# Altium PCB Blue Pill Pinout.PcbDoc
Units mil, origin at the board's own origin, x right, y up, seen from the top; angles counter-clockwise.
Board outline 1210 x 3755 mil, 2 copper layers (Top Layer, Bottom Layer); 25 components, 0 nets, 206 pads, 0 vias.
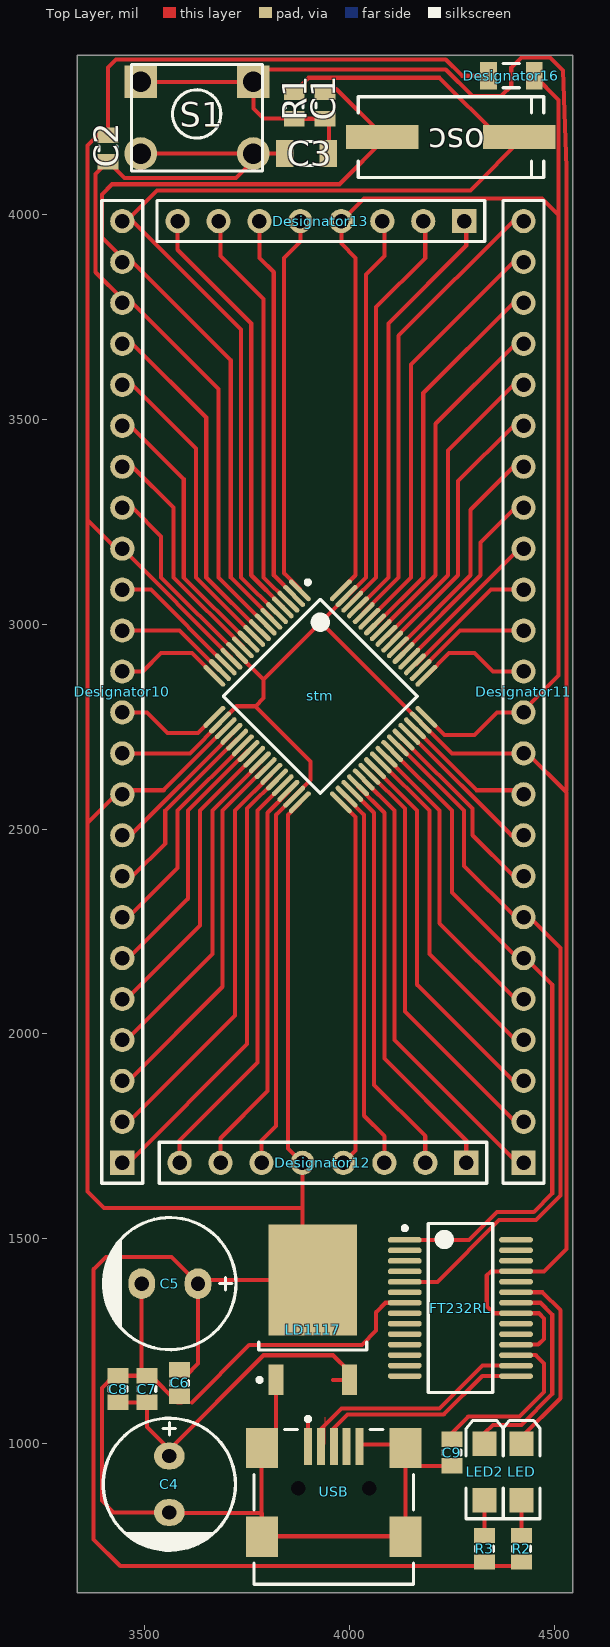
[diagram p0: Top Layer view]
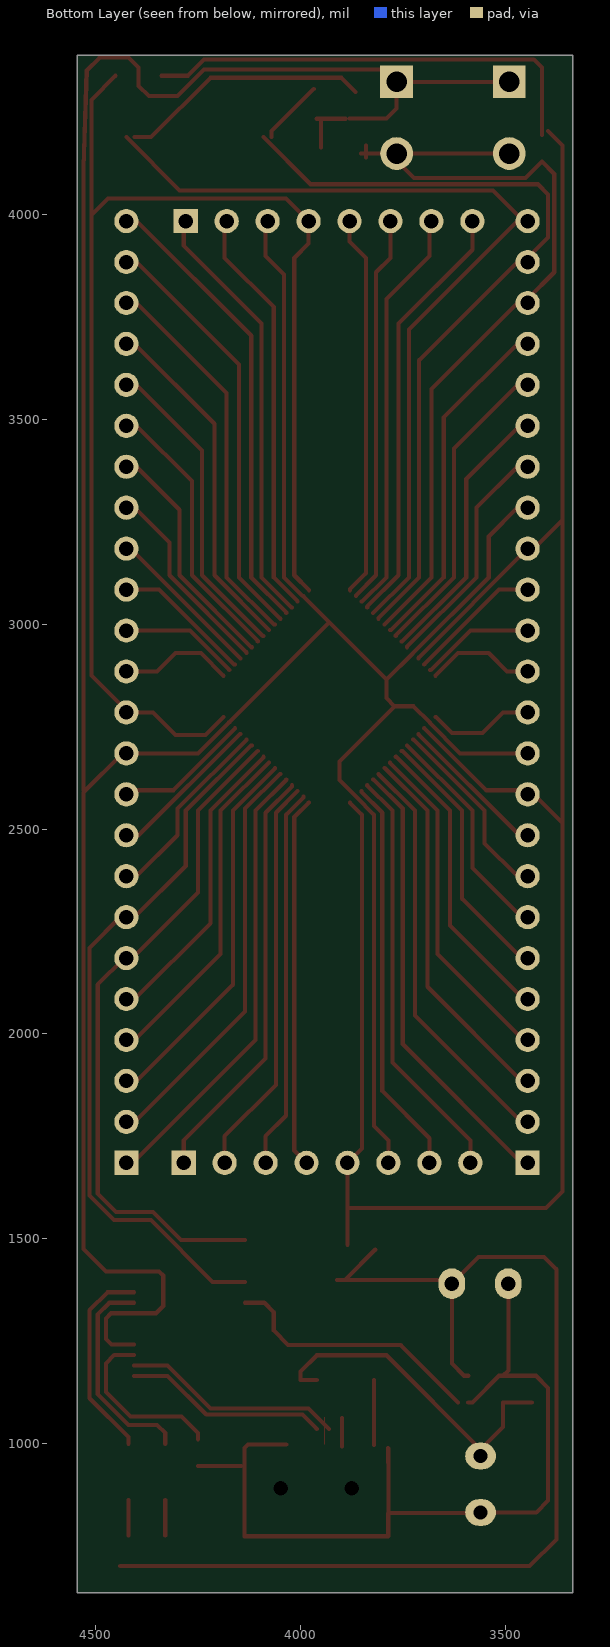
[diagram p1: Bottom Layer view, seen from below]

## Layer stack, top to bottom
Top Solder: solder mask 0.4, Solder Resist, Dk 3.5
Top Layer: signal copper 1.4
Dielectric 1: dielectric 12.6, FR-4, Dk 4.8
Bottom Layer: signal copper 1.4
Bottom Solder: solder mask 0.4, Solder Resist, Dk 3.5

## Board outline
3335,635 4545,635 4545,4390 3335,4390

## Design rules (kind name [scope] priority, off if disabled: settings)
Clearance [All] p1: gap=10 ignorepadtopadclearanceinfootprint=FALSE except(0: Arc-Hole Track-Hole SMDPad-Hole THPad-Hole Via-Hole Fill-Hole Poly-Hole Region-Hole Text-Hole)
PolygonConnect [All] p1: connectstyle=Relief reliefconductorwidth=10 reliefentries=4 polygonreliefangle="90 Angle" airgapwidth=10
RoutingVias [All] p1: holewidth=28 width=50 viastyle="Through Hole" minholewidth=28 minwidth=50 maxholewidth=28 maxwidth=50
SolderMaskExpansion [All] p1: expansion=4 istentingtop=FALSE
Width [All] p1: maxlimit=10 minlimit=10 preferedwidth=10
30 further rules are at their usual default settings.

## Classes and differential pairs
component class Sheet1: C1 C2 C3 osc R1 S1 stm

## Components (designator, comment, footprint, x,y, rotation, side; value= is the part's Value field where it differs from the comment)
C1 "22pF" SMD_CAP_0805 3940,4235.04 r90 top
C2 "22pF" SMD_CAP_0805 3410,4130 r90 top
C3 "Cap Semi" C1206 3895,4150 r0 top value=100nF
C4 "100uF" "cap 03" 3560,900 r90 top
C5 "100uF" "cap 03" 3561.1,1390 r0 top
C6 "100nF" SMD_CAP_0805 3585,1180 r270 top
C7 "100nF" SMD_CAP_0805 3505,1100 r90 top
C8 "100nF" SMD_CAP_0805 3435,1100.04 r90 top
C9 "100nF" SMD_CAP_0805 4250,1009.96 r270 top
Designator10 "Comment" HDR1X24 3445,1685 r90 top
Designator11 "Comment" HDR1X24 4425,1685 r90 top
Designator12 "Comment" HDR1X8 4285,1685 r180 top
Designator13 "Comment" HDR1X8 4280,3985 r180 top
Designator16 "Comment" "Jumper SMD" 4395,4340 r180 top
FT232RL "FT232RL" SSOP-28_N 4270.83,1330.43 r0 top
LD1117 "LM1117DT-x.x" TD03B_N 3910.24,1326.26 r90 top
LED "Red" "LED SMD 1206" 4420,930 r90 top (schematic designator LED1)
LED2 "Red" "LED SMD 1206" 4330,930 r90 top
osc "11.0592 MHz" "Crystal SMD" 4270,4190 r180 top
R1 "10K" "RES 0805 (2012X06L)" 3865,4300 r270 top
R2 "10K" "RES 0805 (2012X06L)" 4420,710.04 r90 top
R3 "10K" "RES 0805 (2012X06L)" 4330,710.04 r90 top
S1 "Switch PB" "Switch - Push to On" 3627.5,4237.5 r0 top
stm "STM32F103R8T6" LQFP64_N 3928.68,2824.39 r315 top
USB "USB mini" USB/SM0.8-6H5 3961.61,683.31 r270 top

## Footprints (in the part's own frame and the unit in brackets; to place one, negate y for a bottom-side part, rotate by r counter-clockwise, add the part's x,y. Pads: shape width x height; smd on the part's side, far side on the other; paste and mask are expansions set on the pad)
C1206 [mm] "Chip Capacitor, Body 3.2x1.6mm, IPC High Density"
  rect 1.1x1.7 smd: 1(-1.35,0) 2(1.35,0)
  silkscreen extent -0.4,-0.75 0.4,0.75, body extent -1.7,-0.9 1.7,0.9, height 1.3
"cap 03" [mil]
  oval 65x75 hole 35: 1(68.9,0) 2(-68.9,0)
  silkscreen extent -161,-161 161,161, body extent -159,-159 157,158, height 473
"Crystal SMD" [mm]
  rect 4.5x1.5 smd: 1(-3.683,0) 2(4.817,0)
  silkscreen extent -5.18,-2.5 6.32,2.5, body extent -5.64,-2.25 6.66,2.25, height 5.18
HDR1X8 [mm] "Connector; Header; 8 Position"
  rect 1.5x1.5 hole 0.9: 1(0,0)
  round 1.5 hole 0.9: 2(2.54,0) 3(5.08,0) 4(7.62,0) 5(10.16,0) 6(12.7,0) 7(15.24,0) 8(17.78,0)
  silkscreen extent -1.27,-1.27 19.05,1.27
HDR1X24 [mm] "Connector; Header; 24 Position"
  rect 1.5x1.5 hole 0.9: 1(0,0)
  round 1.5 hole 0.9: 2(2.54,0) 3(5.08,0) 4(7.62,0) 5(10.16,0) 6(12.7,0) 7(15.24,0) 8(17.78,0) 9(20.32,0) 10(22.86,0) 11(25.4,0) 12(27.94,0) 13(30.48,0) 14(33.02,0) 15(35.56,0) 16(38.1,0) 17(40.64,0) 18(43.18,0) 19(45.72,0) 20(48.26,0) 21(50.8,0) 22(53.34,0) 23(55.88,0) 24(58.42,0)
  silkscreen extent -1.27,-1.27 59.69,1.27
"Jumper SMD" [mm]
  rect 1.05x1.7 smd: 1(-1.425,0) 2(1.425,0)
  silkscreen extent -0.5,-0.75 0.5,0.75, body extent -1.52,-0.76 1.52,0.76, height 0.6
"LED SMD 1206" [mm]
  rect 1.5x1.5 smd: 1(-1.75,0) 2(1.75,0)
  silkscreen extent -2.9,-1.15 3.2,1.15, body extent -1.65,-0.76 1.65,0.69, height 1.36
LQFP64_N [mm] "Thin QFP, 64-Leads, Body 10x10mm, Pitch 0.5mm, IPC Medium Density"
  oval 1.8x0.3 smd: 1(-5.55,3.75) 2(-5.55,3.25) 3(-5.55,2.75) 4(-5.55,2.25) 5(-5.55,1.75) 6(-5.55,1.25) 7(-5.55,0.75) 8(-5.55,0.25) 9(-5.55,-0.25) 10(-5.55,-0.75) 11(-5.55,-1.25) 12(-5.55,-1.75) 13(-5.55,-2.25) 14(-5.55,-2.75) 15(-5.55,-3.25) 16(-5.55,-3.75) 33(5.55,-3.75) 34(5.55,-3.25) 35(5.55,-2.75) 36(5.55,-2.25) 37(5.55,-1.75) 38(5.55,-1.25) 39(5.55,-0.75) 40(5.55,-0.25) 41(5.55,0.25) 42(5.55,0.75) 43(5.55,1.25) 44(5.55,1.75) 45(5.55,2.25) 46(5.55,2.75) 47(5.55,3.25) 48(5.55,3.75)
  oval 0.3x1.8 smd: 17(-3.75,-5.55) 18(-3.25,-5.55) 19(-2.75,-5.55) 20(-2.25,-5.55) 21(-1.75,-5.55) 22(-1.25,-5.55) 23(-0.75,-5.55) 24(-0.25,-5.55) 25(0.25,-5.55) 26(0.75,-5.55) 27(1.25,-5.55) 28(1.75,-5.55) 29(2.25,-5.55) 30(2.75,-5.55) 31(3.25,-5.55) 32(3.75,-5.55) 49(3.75,5.55) 50(3.25,5.55) 51(2.75,5.55) 52(2.25,5.55) 53(1.75,5.55) 54(1.25,5.55) 55(0.75,5.55) 56(0.25,5.55) 57(-0.25,5.55) 58(-0.75,5.55) 59(-1.25,5.55) 60(-1.75,5.55) 61(-2.25,5.55) 62(-2.75,5.55) 63(-3.25,5.55) 64(-3.75,5.55)
  silkscreen extent -5.67,-4.25 4.25,4.57, body extent -5,-5 5,5, height 1.6
"RES 0805 (2012X06L)" [mm] "Chip Resistor, 2-Leads, Body 2.0x1.3mm, IPC High Density _ (0.100 W)"
  rect 0.95x1.3 smd: 1(0,0) 2(1.65,0)
  silkscreen extent 0.67,-0.55 0.98,0.55, body extent -0.19,-0.63 1.84,0.64, height 0.6
SMD_CAP_0805 [mm]
  rect 0.95x1.3 smd: 1(0,0) 2(1.65,0)
  silkscreen extent 0.67,-0.55 0.98,0.55, body extent -0.19,-0.63 1.84,0.63, height 0.65
SSOP-28_N [mm] "SOP, 28-Leads, Body 10.2x5.3mm, Pitch 0.65mm, IPC Medium Density"
  oval 2.1x0.35 smd: 1(-3.45,4.225) 2(-3.45,3.575) 3(-3.45,2.925) 4(-3.45,2.275) 5(-3.45,1.625) 6(-3.45,0.975) 7(-3.45,0.325) 8(-3.45,-0.325) 9(-3.45,-0.975) 10(-3.45,-1.625) 11(-3.45,-2.275) 12(-3.45,-2.925) 13(-3.45,-3.575) 14(-3.45,-4.225) 15(3.45,-4.225) 16(3.45,-3.575) 17(3.45,-2.925) 18(3.45,-2.275) 19(3.45,-1.625) 20(3.45,-0.975) 21(3.45,-0.325) 22(3.45,0.325) 23(3.45,0.975) 24(3.45,1.625) 25(3.45,2.275) 26(3.45,2.925) 27(3.45,3.575) 28(3.45,4.225)
  silkscreen extent -3.57,-5.25 2,5.25, body extent -3.88,-5.17 3.88,5.17, height 2.16
"Switch - Push to On" [mil]
  rect 80x80 hole 50: 1(-137.5,87.5) 1(137.5,87.5)
  round 80 hole 50: 2(-137.5,-87.5) 2(137.5,-87.5)
  silkscreen extent -160,-130 160,130, body extent -155,-121 157,123, height 205
TD03B_N [mm] "D-PAK, 4-Leads, Body 6.1x6.6mm, Pitch 2.29mm, Lead Span 9.7mm, IPC Medium Density"
  rect 1.9x0.95 smd: 1(-4.35,2.28) 3(-4.35,-2.28)
  rect 6.9x5.5 smd: 4(1.85,0)
  silkscreen extent -4.47,-3.35 -2,3.43, body extent -5.18,-3.27 4.76,3.27, height 2.34
USB/SM0.8-6H5 [mm] "Connector; USB2.0, Type B, SM; 5 Position; Right Angle"
  rect 2.3x0.5 smd: 1(-7.85,-1.6) 2(-7.85,-0.8) 3(-7.85,0) 4(-7.85,0.8) 5(-7.85,1.6)
  rect 2.5x2 smd: 6(-7.75,4.45) 7(-2.25,4.45) 8(-7.75,-4.45) 9(-2.25,-4.45)
  round 0.6 hole 0.9 unplated: MH1(-5.25,2.2) MH2(-5.25,-2.2)
  silkscreen extent -9.67,-4.95 0.7,4.95, body extent -8.6,-4.95 0.65,4.95, height 3.93

## Part data
C1 C2 C6 C7 C8 C9: library part Cap-Bipolar, "Bipolar Capacitor", Voltage=100V, Adding Date=1387/12/20, Designer="Saeid Jorablo", Organazation=ControTec
C3: "Capacitor (Semiconductor SIM Model)", LatestRevisionDate=29-May-2009, LatestRevisionNote="IPC-7351 Footprint Added.", PackageDescription="Chip Capacitor", PackageReference=C1206, Published=8-Jun-2000, Publisher="Altium Limited"
C4 C5: library part Cap-Polar, "Polar Capacitor", Voltage=16V, Adding Date=1387/12/20, Designer="Saeid Jorablo", Organazation=ControTec
FT232RL: "USB UART Asynchronous Serial Data Transfer Chip, SSOP-28, Tape and Reel", ComponentLink1Description="Manufacturer Link", ComponentLink1URL=http://www.ftdichip.com/Products/ICs/FT232R.htm, ComponentLink2Description=Datasheet, ComponentLink2URL=http://www.ftdichip.com/Support/Documents/DataSheets/ICs/DS_FT232R.pdf, DatasheetVersion="ver 2.07, Jul-2010", PackageDescription="28-Pin Small Outline Package 0.65 mm Pitch", PackageReference=SSOP-28, PackageVersion=2010, Published=19-Aug-2010, Publisher="Altium Limited"
LD1117: "x.x Volt, 800mA Low-Dropout Linear Regulator, 3-pin TO-252", Manufacturer="National Semiconductor", PackageTopMarking=NSUZXYTT*LM1117*DT-X.X, PartNumber=LM1117DT-3.3, PowerWise=N, Code_JEDEC=TO-252-AA, ComponentLink1Description="LM1117 Datasheet", ComponentLink1URL=http://www.national.com/ds/LM/LM1117.pdf, ComponentLink2Description="LM1117 Web Page", ComponentLink2URL=http://www.national.com/pf/LM/LM1117.html, ComponentLink3Description="TD03B Package Page", ComponentLink3URL=http://www.national.com/packaging/folders/td03b.html, CompType="LDO IC", DatasheetVersion=Apr-2006, PackageDescription="TO252, Molded, Jedec, 6.8 x 6.10 x 2.30mm Body, 3 Lead, 2.28mm Pitch, Surface Mount", PackageReference=TD03B, PackageVersion="revD, Feb-2009", PinCount=3, RoHS=N, Supplier 1=Farnell, Supplier 2=Farnell
LED LED2: library part LED, "LED", Adding Date=1387/12/22, Color=Red, Designer="Saeid Jorablo", Organazation=ControTec, Size="SMD 1206"
osc: library part XTAL, "XTAL Crystal", Company=E.P.I.L, Design Date=11/04/2011
R1 R2 R3: library part Resistor, "Resistor", Power="1/8 W", Tolerance=5%
S1: "Push Button Switch"
stm: "STM32 ARM-based 32-bit MCU with 64 Kbytes Flash, 64-pin LQFP, Industrial Temperature", ComponentLink1Description="Manufacturer Link", ComponentLink1URL=www.st.com/stm32, ComponentLink2Description=Datasheet, ComponentLink2URL=http://www.st.com/stonline/products/literature/ds/13587.pdf, DatasheetVersion="rev6, Mar-2008", PackageDescription="64-Pin Low-Profile Quad Flat Pack, 10 x 10 mm Body, 0.5 mm Pitch (LQFP64)", PackageReference=LQFP64, PackageVersion=Mar-2008, Published=30-May-2008, Publisher="Altium Limited"
USB: "mini USB Connector"

## Nets (pads, with @x,y where several pads share a name; then routed paths per layer and width w, separated by ;. In a path a pad name is that pad's centre, name@x,y a point inside that pad or via, vN(x,y) a via of type N, cw(c..) or ccw(c..) an arc to the next point about the centre after c; other vN are vias at no path point)
pads on no net: C1.1 C1.2 C2.1 C2.2 C3.1 C3.2 C4.1 C4.2 C5.1 C5.2 C6.1 C6.2 C7.1 C7.2 C8.1 C8.2 C9.1 C9.2 Designator10.1 Designator10.2 Designator10.3 Designator10.4 Designator10.5 Designator10.6 Designator10.7 Designator10.8 Designator10.9 Designator10.10 Designator10.11 Designator10.12 Designator10.13 Designator10.14 Designator10.15 Designator10.16 Designator10.17 Designator10.18 Designator10.19 Designator10.20 Designator10.21 Designator10.22 Designator10.23 Designator10.24 Designator11.1 Designator11.2 Designator11.3 Designator11.4 Designator11.5 Designator11.6 Designator11.7 Designator11.8 Designator11.9 Designator11.10 Designator11.11 Designator11.12 Designator11.13 Designator11.14 Designator11.15 Designator11.16 Designator11.17 Designator11.18 Designator11.19 Designator11.20 Designator11.21 Designator11.22 Designator11.23 Designator11.24 Designator12.1 Designator12.2 Designator12.3 Designator12.4 Designator12.5 Designator12.6 Designator12.7 Designator12.8 Designator13.1 Designator13.2 Designator13.3 Designator13.4 Designator13.5 Designator13.6 Designator13.7 Designator13.8 Designator16.1 Designator16.2 FT232RL.1 FT232RL.2 FT232RL.3 FT232RL.4 FT232RL.5 FT232RL.6 FT232RL.7 FT232RL.8 FT232RL.9 FT232RL.10 FT232RL.11 FT232RL.12 FT232RL.13 FT232RL.14 FT232RL.15 FT232RL.16 FT232RL.17 FT232RL.18 FT232RL.19 FT232RL.20 FT232RL.21 FT232RL.22 FT232RL.23 FT232RL.24 FT232RL.25 FT232RL.26 FT232RL.27 FT232RL.28 LD1117.1 LD1117.3 LD1117.4 LED2.1 LED2.2 LED.1 LED.2 osc.1 osc.2 R1.1 R1.2 R2.1 R2.2 R3.1 R3.2 S1.1 S1.2 stm.1 stm.2 stm.3 stm.4 stm.5 stm.6 stm.7 stm.8 stm.9 stm.10 stm.11 stm.12 stm.13 stm.14 stm.15 stm.16 stm.17 stm.18 stm.19 stm.20 stm.21 stm.22 stm.23 stm.24 stm.25 stm.26 stm.27 stm.28 stm.29 stm.30 stm.31 stm.32 stm.33 stm.34 stm.35 stm.36 stm.37 stm.38 stm.39 stm.40 stm.41 stm.42 stm.43 stm.44 stm.45 stm.46 stm.47 stm.48 stm.49 stm.50 stm.51 stm.52 stm.53 stm.54 stm.55 stm.56 stm.57 stm.58 stm.59 stm.60 stm.61 stm.62 stm.63 stm.64 USB.1 USB.2 USB.3 USB.4 USB.5 USB.6 USB.7 USB.8 USB.9 USB.MH1 USB.MH2
copper on no net: | length 75193.1
  Top Layer w0: 3940.12,997.36 3940.12,1063.4 ; 3980,3965 3980,3985
  Top Layer w10: 3395,4205 3360,4170 3360,4005 3360,3255 ; 3410,4194.96 3410,4360 3430,4380 4235,4380 4275,4340 4338.9,4340 ; 3435,1100.04 3504.96,1100.04 3505,1100 3505,1040 3560,985 3790,1215 3960,1215 4000,1175 4000,1155 3960,1155 ; 3445,1685 3460,1685 3750,1975 3750,2550 3821.17,2621.17 3822.9,2621.17 ; 3445,1785 3460,1785 3720,2045 3720,2545 3808.98,2633.98 3808.98,2635.09 ; 3445,1885 3460,1885 3690,2115 3690,2545 3794.01,2649.01 3795.06,2649.01 ; 3445,1985 3455,1985 3665,2195 3665,2545 3781.14,2661.14 3781.14,2662.93 ; 3445,2085 3455,2085 3635,2265 3635,2545 3766.85,2676.85 3767.22,2676.85 ; 3445,2185 3460,2185 3605,2330 3605,2545 3750.77,2690.77 3753.3,2690.77 ; 3445,2285 3460,2285 3580,2405 3580,2545 3739.38,2704.38 3739.38,2704.69 ; 3445,2385 3470,2385 3550,2465 3550,2545 3723.61,2718.61 3725.46,2718.61 ; 3445,2685 3610,2685 3683.7,2758.7 3683.7,2760.36 3723.34,2800 3770,2800 ; 3445,2785 3505,2785 3555,2735 3630,2735 3669.28,2774.28 3669.78,2774.28 ; 3445,2885 3495,2885 3540,2930 3615,2930 3669.78,2875.22 3669.78,2874.5 ; 3445,2985 3585,2985 3681.58,2888.42 3683.7,2888.42 ; 3445,3085 3515,3085 3697.62,2902.38 ; 3445,3285 3470,3285 3540,3215 3540,3115 3724.82,2930.18 3725.46,2930.18 3725.46,2929.54 3790,2865 ; 3445,3385 3470,3385 3570,3285 3570,3115 3739.38,2945.62 3739.38,2944.1 ; 3445,3485 3465,3485 3595,3355 3595,3115 3751.98,2958.02 3753.3,2958.02 ; 3445,3585 3470,3585 3625,3430 3625,3115 3767.22,2972.78 3767.22,2971.94 ; 3445,3685 3470,3685 3650,3505 3650,3115 3779.14,2985.86 3781.14,2985.86 ; 3465,2485 3711.54,2731.54 3711.54,2732.53 ; 3490,4150 3765,4150 ; 3490,4325 3765,4325 ; 3492.2,1390 3492.2,1177.76 3505,1164.96 ; 3580,3985 3580,3915 3760,3735 3760,3120 3836.81,3043.19 3836.81,3041.54 ; 3585,1685 3585,1740 3775,1930 3775,2545 3836.81,2606.81 3836.81,2607.25 ; 3590,1100.04 3579.96,1100.04 3515.04,1164.96 3505,1164.96 ; 3590,1165 3600,1165 3630,1195 3630,1390 ; 3615.04,1100.04 3755,1240 4030,1240 4065,1275 4065,1320 4088.23,1343.23 4135,1343.23 ; 3685,1685 3685,1745 3800,1860 3800,2540 3850.73,2590.73 3850.73,2593.33 ; 3685,3985 3685,3900 3790,3795 3790,3115 3849.54,3055.46 3850.73,3055.46 ; 3697.62,2746.44 3546.18,2595 3455,2595 3445,2585 3430,2585 3360,2515 ; 3711.54,2916.26 3711.54,2918.46 3445,3185 3430,3185 3360,3255 ; 3773.75,4141.25 3722.46,4089.96 3720,4089.96 3450,4089.96 3410,4129.96 3380,4099.96 3380,4089.96 3380,3860 3445,3795 3445,3785 3470,3785 3680,3575 3680,3115 3795.06,2999.94 3795.06,2999.78 ; 3780,3985 3780,3895 3815,3860 3815,3850 3815,3120 3864.65,3070.35 3864.65,3069.38 ; 3782.5,4132.5 3765,4150 ; 3785,1685 3785,1740 3820,1775 3820,2535 3864.41,2579.41 3864.65,2579.41 3864.65,2579.65 3905,2620 3905,2665 3770,2800 ; 3785,3965 3785,3985 ; 3786.42,953.58 3786.42,988.43 3785,987.01 3785,773.31 ; 3808.98,3013.7 3808.98,3016.02 3710,3115 3710,3645 3470,3885 3445,3885 3445,3895 3395,3945 3395,4050 3420,4075 3975.35,4075 4090.35,4190 ; 3817.2,1472.8 3890,1400 ; 3820.47,995.47 3820.47,1155 ; 3822.9,3027.62 3822.38,3027.62 3735,3115 3735,3720 3470,3985 3445,3985 3455,3985 3530,4060 4295,4060 4425,4190 ; 3840,4140 3840,4170 ; 3851.85,4150 3765,4150 ; 3865,4300 3900,4335 4220,4335 4365,4190 4405,4190 ; 3878.57,2565.49 3878.57,2563.57 3850,2535 3850,1720 3885,1685 3885,1485 ; 3878.57,3083.29 3878.57,3086.43 3840,3125 3840,3895 3880,3935 3880,3985 ; 3880,4235.04 3789.96,4235.04 3765,4260 3765,4325 ; 3885,1615 3885,1575 3400,1575 3360,1615 3360,2515 ; 3890,4235 3960,4235 ; 3898.62,992.36 3898.62,1062.01 ; 3910.24,1399.09 3639.09,1399.09 3630,1390 ; 3930,1035 3980,1085 4220,1085 4324.69,1189.69 4406.65,1189.69 ; 3930,3005 4173.66,2761.34 4173.66,2760.36 4174.64,2760.36 4250,2685 4425,2685 4435,2685 4530,2590 4530,1475 4475,1420 4406.65,1420 4345,1420 4335,1410 4335,1335 4352.36,1317.64 4406.65,1317.64 4462.36,1317.64 4475,1305 4475,1255 4460.87,1240.87 4406.65,1240.87 ; 3950,4165 3950,4235 ; 3960,1035 3995,1070 4230,1070 4324.1,1164.1 4406.65,1164.1 ; 3967.5,4307.5 4070.35,4204.65 4070.35,4190 ; 3978.79,2565.49 3979.51,2565.49 4015,2530 4015,1715 3985,1685 ; 3978.79,3083.29 3978.79,3083.79 4015,3120 4015,3895 3980,3930 3980,3985 4035,4040 4470,4040 4510,4000 ; 3992.71,2579.41 3992.71,2577.29 4035,2535 4035,1800 4085,1750 4085,1685 ; 4006.67,2593.33 4060,2540 4060,1875 4185,1750 4185,1685 ; 4006.63,3055.46 4006.63,3056.63 4065,3115 4065,3775 4185,3895 4185,3985 ; 4020.55,2607.25 4020.55,2604.45 4085,2540 4085,1940 4285,1740 4285,1685 ; 4020.55,3041.54 4021.54,3041.54 4095,3115 4095,3735 4285,3925 4285,3985 ; 4034.47,2621.17 4034.47,2620.53 4110,2545 4110,1985 4410,1685 4425,1685 ; 4034.47,3027.62 4034.47,3029.47 4120,3115 4120,3705 4400,3985 4425,3985 ; 4034.6,997.36 4127.88,997.36 4136.81,988.43 4136.81,774.73 4135.39,773.31 3785,773.31 ; 4048.39,2635.09 4049.91,2635.09 4135,2550 4135,2055 4405,1785 4425,1785 ; 4048.39,3013.7 4048.7,3013.7 4150,3115 4150,3635 4400,3885 4425,3885 ; 4062.31,2649.01 4062.31,2647.69 4165,2545 4165,2120 4400,1885 4425,1885 ; 4062.31,2999.78 4064.78,2999.78 4180,3115 4180,3565 4400,3785 4425,3785 ; 4076.23,2662.93 4077.07,2662.93 4195,2545 4195,2195 4405,1985 4425,1985 ; 4076.23,2985.86 4076.23,2986.23 4210,3120 4210,3490 4405,3685 4425,3685 ; 4085,3985 4085,3900 4040,3855 4040,3115 3994.38,3069.38 3992.71,3069.38 3992.71,3067.71 3790,2865 ; 4090.15,2676.85 4090.15,2674.85 4220,2545 4220,2270 4405,2085 4425,2085 ; 4090.15,2971.94 4091.94,2971.94 4240,3120 4240,3425 4400,3585 4425,3585 ; 4104.07,2690.77 4104.23,2690.77 4250,2545 4250,2345 4410,2185 4425,2185 4430,2185 4495,2120 4495,1635 4495,1610 4450,1565 4360,1565 4291.77,1496.77 4135,1496.77 ; 4104.07,2958.02 4104.07,2959.07 4265,3120 4265,3350 4400,3485 4425,3485 ; 4117.99,2704.69 4120.31,2704.69 4280,2545 4280,2410 4405,2285 4425,2285 4440,2285 4515,2210 4515,1605 4455,1545 4365,1545 4214.41,1394.41 4135,1394.41 ; 4117.99,2944.1 4119.1,2944.1 4295,3120 4295,3280 4400,3385 4425,3385 ; 4131.91,2718.61 4131.91,2718.09 4300,2550 4300,2485 4400,2385 4425,2385 ; 4131.91,2930.18 4131.91,2931.91 4320,3120 4320,3200 4405,3285 4425,3285 ; 4136.81,771.89 3786.42,771.89 ; 4145,945 4250,945 ; 4145.83,2732.53 4147.47,2732.53 4395,2485 4425,2485 ; 4145.83,2916.26 4146.26,2916.26 4415,3185 ; 4159.75,2746.44 4159.75,2745.25 4310,2595 4415,2595 4425,2585 ; 4159.75,2902.34 4162.34,2902.34 4345,3085 4425,3085 ; 4173.66,2888.42 4173.66,2888.66 4270,2985 4425,2985 ; 4187.58,2774.28 4231.87,2730 4305,2730 4360,2785 4425,2785 4425,2790 4510,2875 4510,4000 ; 4187.58,2874.5 4243.08,2930 4305,2930 4350,2885 4425,2885 ; 4250,1009.96 4250,1025 4290,1065 4415,1065 4475,1125 4475,1195 4454.72,1215.28 4406.65,1215.28 ; 4330,775 4330,861.1 ; 4330,998.9 4330,1025 4350,1045 4420,1045 4495,1120 4495,1315 4466.77,1343.23 4406.65,1343.23 ; 4406.65,1368.82 4471.18,1368.82 4515,1325 4515,1110 4420,1015 4420,998.9 ; 4420,775 4420,861.1 ; 4440,700 3440,700 3375,765 3375,1425 3405,1455 3565,1455 3630,1390 ; 4451.1,4340 4510,4281.1 4510,4000 ; 4530,2595 4530,4115 4521.79,4353.21 4490,4385 4420,4385 4395,4360 4395,4315 4370,4290 4300,4290 4235,4355 4170,4355 3795,4355 3765,4325 ; 3360,2515 3360,3255 ; 3505,1164.96 3435.04,1164.96 3435,1165 3425,1165 3395,1135 3395,860 3423.9,831.1 3560,831.1 3561.1,830 3785,830 3786.42,828.58 3786.42,771.89 ; 3770,2800 3790,2820 3790,2865 ; 3785,773.31 3786.42,771.89 ; 3785,773.31 3786.42,771.89

## Text inside footprints (layer, text, board x,y; h text height)
USB: Mechanical 1 "PCB Edge" at 3802.7,666.29 h9.84